# Altium PCB RP2040_minimal.PcbDoc
Units mm, origin at the board's own origin, x right, y up, seen from the top; angles counter-clockwise.
Board outline 50 x 50 mm, 2 copper layers (F.Cu, B.Cu); 41 components, 43 nets, 232 pads, 57 vias.
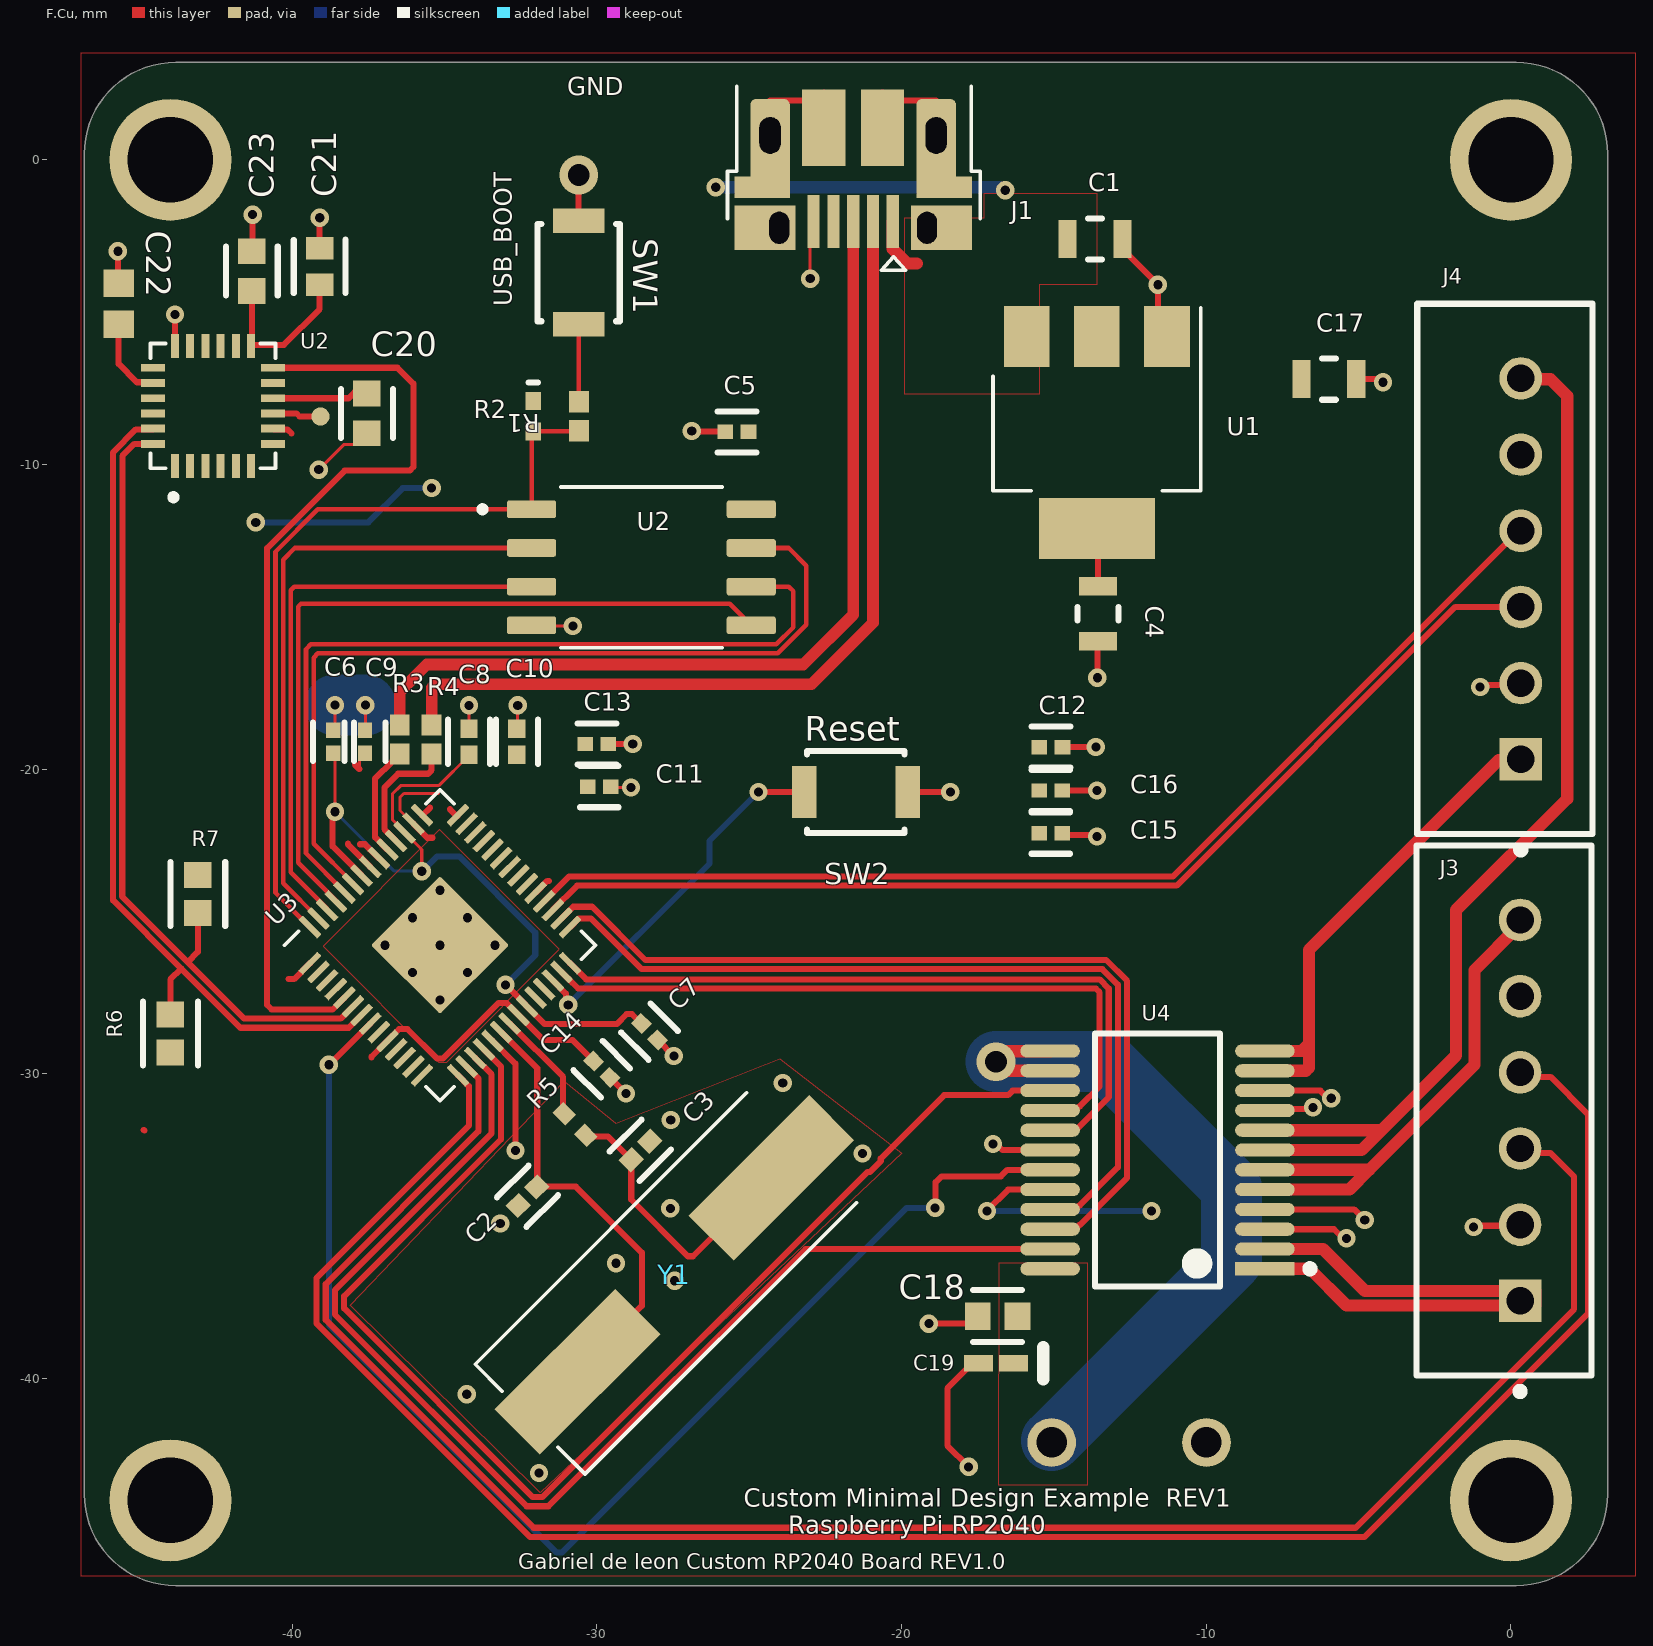
[diagram p0: F.Cu view]
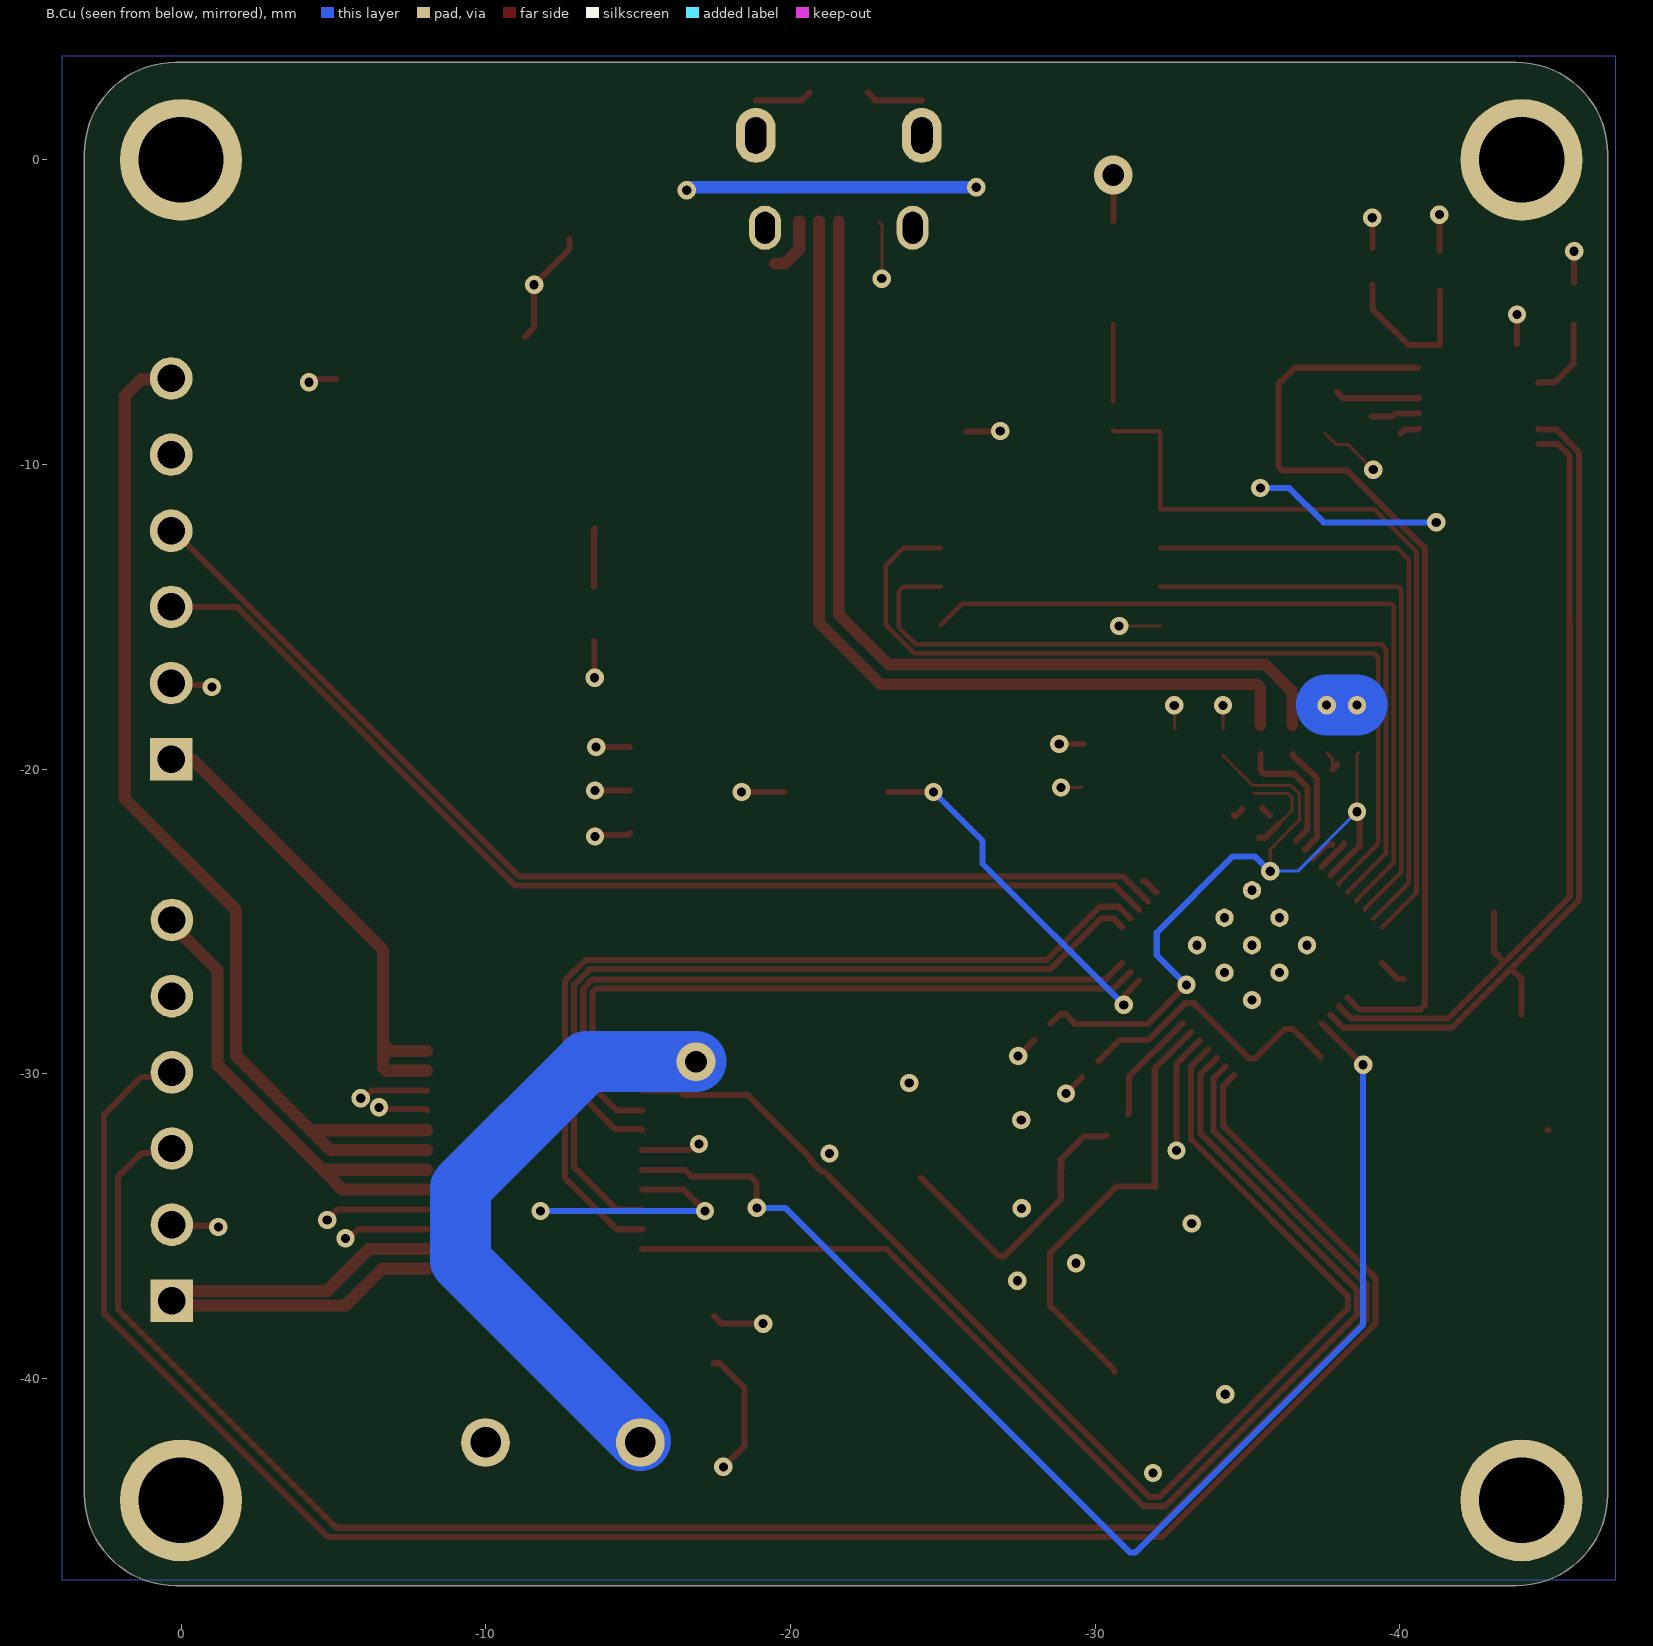
[diagram p1: B.Cu view, seen from below]

## Layer stack, top to bottom
F.Mask: solder mask 0.0102, Solder Resist, Dk 3.5
F.Cu: signal copper 0.0356
Dielectric 1: dielectric 0.32, FR-4, Dk 4.8
B.Cu: signal copper 0.0356
B.Mask: solder mask 0.0102, Solder Resist, Dk 3.5

## Board outline
-46.825,-43.8 -46.825,0.2 cw(c-43.825,0.2) -43.825,3.2 0.175,3.2 cw(c0.175,0.2) 3.175,0.2 3.175,-43.8 cw(c0.175,-43.8) 0.175,-46.8 -43.825,-46.8 cw(c-43.825,-43.8)

## Design rules (kind name [scope] priority, off if disabled: settings)
AssemblyTestPointUsage [All] p0: scope1count=1 scope1_0_kind=Board scope1_0_value=Board scope2count=1 scope2_0_kind=Board scope2_0_value=Board commentlength=0
AssemblyTestpoint [All] p0: scope1count=1 scope1_0_kind=Board scope1_0_value=Board scope2count=1 scope2_0_kind=Board scope2_0_value=Board commentlength=0
BoardOutlineClearance [All] p0: scope1count=1 scope1_0_kind=Board scope1_0_value=Board scope2count=1 scope2_0_kind=Board scope2_0_value=Board commentlength=0 gap=0.2
BoardOutlineClearance [All] p1: gap=0.2 ignorepadtopadclearanceinfootprint=FALSE
Clearance [All] p0: scope1count=1 scope1_0_kind=Board scope1_0_value=Board scope2count=1 scope2_0_kind=Board scope2_0_value=Board commentlength=0 gap=0.2
Clearance [All] p1: gap=0.2 ignorepadtopadclearanceinfootprint=TRUE except(0: Arc-Text Arc-Hole Track-Text Track-Hole SMDPad-Text SMDPad-Hole THPad-Text THPad-Hole Via-Text Via-Hole Fill-Text Fill-Hole Poly-Text Poly-Hole Region-Text Region-Hole Text-Text Text-Hole; 0.1: Arc-Arc Arc-Track Track-Track)
ComponentClearance [All] p0: scope1count=1 scope1_0_kind=Board scope1_0_value=Board scope2count=1 scope2_0_kind=Board scope2_0_value=Board commentlength=0 gap=0.254 collisioncheckmode=3
DiffPairsRouting [All] p0: scope1count=1 scope1_0_kind=Board scope1_0_value=Board scope2count=1 scope2_0_kind=Board scope2_0_value=Board commentlength=0
DiffPairsRouting [All] p1: maxlimit=0.254 minlimit=0.254 mostfreqgap=0.254 toplayer_minwidth=0.381 toplayer_maxwidth=0.381 toplayer_prefwidth=0.381 bottomlayer_minwidth=0.381 bottomlayer_maxwidth=0.381 bottomlayer_prefwidth=0.381 maxuncoupledlength=12.7
FabricationTestPointUsage [All] p0: scope1count=1 scope1_0_kind=Board scope1_0_value=Board scope2count=1 scope2_0_kind=Board scope2_0_value=Board commentlength=0 valid=0 allowmultiple=FALSE
FabricationTestpoint [All] p0: scope1count=1 scope1_0_kind=Board scope1_0_value=Board scope2count=1 scope2_0_kind=Board scope2_0_value=Board commentlength=0 side=3 testpointundercomponent=TRUE minsize=1.016 maxsize=2.54 preferedsize=1.524 minholesize=0 maxholesize=1.016 preferedholesize=0.813 testpointgrid=0.025
FanoutControl Fanout_Default [All] p0: scope1count=1 scope1_0_kind=Board scope1_0_value=Board scope2count=1 scope2_0_kind=Board scope2_0_value=Board commentlength=30 // Fanout_Default (Default Rule)
FanoutControl Fanout_Small [All] p0 off: scope1count=1 scope1_0_kind=Board scope1_0_value=Board scope2count=1 scope2_0_kind=Board scope2_0_value=Board commentlength=84 // Protel DXP Scope 1 Expression Was: (CompPinCount < 5)   Fanout_Small (Default Rule)
FanoutControl Fanout_SOIC [All] p0 off: scope1count=1 scope1_0_kind=Board scope1_0_value=Board scope2count=1 scope2_0_kind=Board scope2_0_value=Board commentlength=71 // Protel DXP Scope 1 Expression Was: IsSOIC   Fanout_SOIC (Default Rule)
FanoutControl Fanout_LCC [All] p0 off: scope1count=1 scope1_0_kind=Board scope1_0_value=Board scope2count=1 scope2_0_kind=Board scope2_0_value=Board commentlength=69 // Protel DXP Scope 1 Expression Was: IsLCC   Fanout_LCC (Default Rule)
FanoutControl Fanout_BGA [All] p0 off: scope1count=1 scope1_0_kind=Board scope1_0_value=Board scope2count=1 scope2_0_kind=Board scope2_0_value=Board commentlength=69 // Protel DXP Scope 1 Expression Was: IsBGA   Fanout_BGA (Default Rule)
Height [All] p0: scope1count=1 scope1_0_kind=Board scope1_0_value=Board scope2count=1 scope2_0_kind=Board scope2_0_value=Board commentlength=0
HoleSize [All] p0: scope1count=1 scope1_0_kind=Board scope1_0_value=Board scope2count=1 scope2_0_kind=Board scope2_0_value=Board commentlength=0 absolutevalues=TRUE maxlimit=6.3 minlimit=0.3 maxpercent=80.000 minpercent=20.000
HoleSize [All] p1: absolutevalues=TRUE maxlimit=6.3 minlimit=0.3 maxpercent=80.000 minpercent=20.000
HoleToHoleClearance [All] p0: scope1count=1 scope1_0_kind=Board scope1_0_value=Board scope2count=1 scope2_0_kind=Board scope2_0_value=Board commentlength=0
LayerPairs [All] p0: scope1count=1 scope1_0_kind=Board scope1_0_value=Board scope2count=1 scope2_0_kind=Board scope2_0_value=Board commentlength=0 enforce=TRUE
MinimumAnnularRing [All] p0: scope1count=1 scope1_0_kind=Board scope1_0_value=Board scope2count=1 scope2_0_kind=Board scope2_0_value=Board commentlength=0 minimumring=0.13
MinimumAnnularRing [All] p1: minimumring=0.13
MinimumSolderMaskSliver [All] p0: scope1count=1 scope1_0_kind=Board scope1_0_value=Board scope2count=1 scope2_0_kind=Board scope2_0_value=Board commentlength=0
MinimumSolderMaskSliver [All] p1: minsoldermaskwidth=0.098
NetAntennae [All] p0: scope1count=1 scope1_0_kind=Board scope1_0_value=Board scope2count=1 scope2_0_kind=Board scope2_0_value=Board commentlength=0
PasteMaskExpansion [All] p0: scope1count=1 scope1_0_kind=Board scope1_0_value=Board scope2count=1 scope2_0_kind=Board scope2_0_value=Board commentlength=0 expansion=0
PlaneClearance [All] p0: scope1count=1 scope1_0_kind=Board scope1_0_value=Board scope2count=1 scope2_0_kind=Board scope2_0_value=Board commentlength=0 clearance=0.508
PlaneConnect [All] p0: scope1count=1 scope1_0_kind=Board scope1_0_value=Board scope2count=1 scope2_0_kind=Board scope2_0_value=Board commentlength=0 planeconnectstyle=Relief reliefexpansion=0.508 reliefentries=4 reliefconductorwidth=0.254 reliefairgap=0.254
PolygonConnect [All] p0: scope1count=1 scope1_0_kind=Board scope1_0_value=Board scope2count=1 scope2_0_kind=Board scope2_0_value=Board commentlength=0 connectstyle=Relief reliefconductorwidth=0.3 reliefentries=4 polygonreliefangle="90 Angle"
PolygonConnect "PTH-M3 Connect" [All] p0: scope1count=1 scope1_0_kind=Board scope1_0_value=Board scope2count=1 scope2_0_kind=Footprint scope2_0_value=PTH-M3 commentlength=0 connectstyle=Direct reliefconductorwidth=0.254 reliefentries=4 polygonreliefangle="90 Angle"
PolygonConnect "PTH-M3 Connect" [All vs HasFootprint('PTH-M3')] p1: connectstyle=Direct reliefconductorwidth=0.254 reliefentries=4 polygonreliefangle="90 Angle" airgapwidth=0.254
PolygonConnect [All] p2: thpad.connectstyle=Relief thpad.reliefconductorwidth=0.3 thpad.reliefentries=4 thpad.polygonreliefangle="90 Angle" thpad.airgapwidth=0.1 smdpad.connectstyle=Relief smdpad.reliefconductorwidth=0.3 smdpad.reliefentries=4 smdpad.polygonreliefangle="90 Angle" smdpad.airgapwidth=0.1 via.connectstyle=Direct via.reliefconductorwidth=0.254 via.reliefentries=4 via.polygonreliefangle="90 Angle" via.airgapwidth=0.254
RoutingCorners [All] p0: scope1count=1 scope1_0_kind=Board scope1_0_value=Board scope2count=1 scope2_0_kind=Board scope2_0_value=Board commentlength=0 cornerstyle=45-Degree minsetback=2.54 maxsetback=2.54
RoutingLayers [All] p0: scope1count=1 scope1_0_kind=Board scope1_0_value=Board scope2count=1 scope2_0_kind=Board scope2_0_value=Board commentlength=0 top layer=Automatic bottom layer=Automatic
RoutingPriority [All] p0: scope1count=1 scope1_0_kind=Board scope1_0_value=Board scope2count=1 scope2_0_kind=Board scope2_0_value=Board commentlength=0
RoutingTopology [All] p0: scope1count=1 scope1_0_kind=Board scope1_0_value=Board scope2count=1 scope2_0_kind=Board scope2_0_value=Board commentlength=0 topology=Shortest
RoutingVias [All] p0: scope1count=1 scope1_0_kind=Board scope1_0_value=Board scope2count=1 scope2_0_kind=Board scope2_0_value=Board commentlength=0 holewidth=0.3 width=0.6 viastyle="Through Hole" minholewidth=0.3 minwidth=0.45 maxholewidth=6.35 maxwidth=3
RoutingVias [All] p1: holewidth=0.3 width=0.6 viastyle="Through Hole" minholewidth=0.3 minwidth=0.45 maxholewidth=6.35 maxwidth=3
ShortCircuit [All] p0: scope1count=1 scope1_0_kind=Board scope1_0_value=Board scope2count=1 scope2_0_kind=Board scope2_0_value=Board commentlength=0 allowed=FALSE
SilkToBoardRegionClearance [All] p0: scope1count=1 scope1_0_kind=Board scope1_0_value=Board scope2count=1 scope2_0_kind=Board scope2_0_value=Board commentlength=0
SilkToSilkClearance [All] p0: scope1count=1 scope1_0_kind=Board scope1_0_value=Board scope2count=1 scope2_0_kind=Board scope2_0_value=Board commentlength=0
SilkToSilkClearance [All] p1: silktosilkclearance=0.1
SilkToSolderMaskClearance [All] p0 off: scope1count=1 scope1_0_kind=Board scope1_0_value=Board scope2count=1 scope2_0_kind=Board scope2_0_value=Board commentlength=44 // Protel DXP Scope 1 Expression Was: IsPad
SilkToSolderMaskClearance [IsPad] p1: minsilkscreentomaskgap=0 clearancetoexposedcopper=TRUE
SolderMaskExpansion [All] p0: scope1count=1 scope1_0_kind=Board scope1_0_value=Board scope2count=1 scope2_0_kind=Board scope2_0_value=Board commentlength=0 expansion=0.038
SolderMaskExpansion "Tent Vias" [All] p0 off: scope1count=1 scope1_0_kind=Board scope1_0_value=Board scope2count=1 scope2_0_kind=Board scope2_0_value=Board commentlength=44 expansion=0.102 // Protel DXP Scope 1 Expression Was: IsVia
SolderMaskExpansion "Tent Vias" [IsVia] p1: expansion=0.102 istentingtop=TRUE
SolderMaskExpansion [All] p2: expansion=0.038 istentingtop=FALSE
UnRoutedNet [All] p0: scope1count=1 scope1_0_kind=Board scope1_0_value=Board scope2count=1 scope2_0_kind=Board scope2_0_value=Board commentlength=0
UnpouredPolygon [All] p0: scope1count=1 scope1_0_kind=Board scope1_0_value=Board scope2count=1 scope2_0_kind=Board scope2_0_value=Board commentlength=0
Width [All] p0: scope1count=1 scope1_0_kind=Board scope1_0_value=Board scope2count=1 scope2_0_kind=Board scope2_0_value=Board commentlength=0 maxlimit=2 minlimit=0.1 preferedwidth=0.2
Width PowerNets [All] p0: scope1count=1 scope1_0_kind=NetClass scope1_0_value=PowerNets scope2count=1 scope2_0_kind=Board scope2_0_value=Board commentlength=0 maxlimit=0.5 minlimit=0.2 preferedwidth=0.2
Width PowerNets [InNetClass('PowerNets')] p1: maxlimit=0.5 minlimit=0.2 preferedwidth=0.2 minimp=50.000000 maximp=50.000000 favimp=50.000000
Width [All] p2: maxlimit=2 minlimit=0.1 preferedwidth=0.2 minimp=50.000000 maximp=50.000000 favimp=50.000000
25 further rules are at their usual default settings.

## Classes and differential pairs
differential pair " ": +USB_D_P -USB_D_N

## Components (designator, comment, footprint, x,y, rotation, side; value= is the part's Value field where it differs from the comment)
C1 "GRM21BR61C106KE15K" FP-GRM21B-0_1-MFG -13.652,-2.6 r0 top
C2 "GCM1555C1H270JA16D" FP-GCM155-0_05-IPC_B -32.278,-34.019 r225 top
C3 "GCM1555C1H270JA16D" FP-GCM155-0_05-IPC_B -28.572,-32.513 r45 top
C4 "GRM21BR61C106KE15K" FP-GRM21B-0_1-MFG -13.55,-14.9 r270 top
C5 "GRM155R71E104KE14J" FP-GRM155-0_05-IPC_C -25.405,-8.93 r180 top
C6 "GRM155R71E104KE14J" FP-GRM155-0_05-IPC_C -38.65,-19.1 r90 top
C7 "GRM155R71E104KE14J" FP-GRM155-0_05-IPC_C -28.275,-28.616 r315 top
C8 "GCM1555C1H270JA16D" FP-GCM155-0_05-IPC_B -34.2,-19.1 r90 top
C9 "GRM155R71E104KE14J" FP-GRM155-0_05-IPC_C -37.611,-19.1 r90 top
C10 "GCM1555C1H270JA16D" FP-GCM155-0_05-IPC_B -32.625,-19.1 r90 top
C11 "GRM155R71E104KE14J" FP-GRM155-0_05-IPC_C -29.925,-20.575 r0 top
C12 "GRM155R71E104KE14J" FP-GRM155-0_05-IPC_C -15.1,-19.275 r0 top
C13 "GRM155R71E104KE14J" FP-GRM155-0_05-IPC_C -30.004,-19.175 r0 top
C14 "GRM155R71E104KE14J" FP-GRM155-0_05-IPC_C -29.843,-29.848 r315 top
C15 "GRM155R71E104KE14J" FP-GRM155-0_05-IPC_C -15.105,-22.1 r0 top
C16 "GRM155R71E104KE14J" FP-GRM155-0_05-IPC_C -15.105,-20.7 r0 top
C17 "GRM21BR61C106KE15K" FP-GRM21B-0_1-MFG -5.975,-7.2 r0 top
C18 "C0603X104K5RACTU" FP-C0603-CJ-MFG -16.85,-37.95 r0 top
C19 "TR8M106M010C2000" VISH-TR8-M_L -16.9,-39.5 r180 top
C20 "C0603X104K5RACTU" FP-C0603-CJ-MFG -37.55,-8.325 r270 top
C21 "C0603C103J3GACTU" FP-C0603C-CF-MFG -39.1,-3.5 r90 top
C22 "C0603X222K5RACTU" CAPC1608X87X35NL15T15 -45.7,-4.725 r90 top
C23 "C0603X104K5RACTU" FP-C0603-CJ-MFG -41.325,-3.65 r90 top
J1 "USB_B_Micro" USB_Micro-B_Amphenol_10103594-0001LF_Horizontal_modified -21.59,0.8 r180 top
J3 "B6B-XH-A(LF)(SN)" FP-B6B-XH-A_LF_SN-MFG -0.225,-31.2 r90 top
J4 "B6B-XH-A(LF)(SN)" FP-B6B-XH-A_LF_SN-MFG -0.2,-13.425 r90 top
R1 "RC0402FR-0727R4L" RESC1005X40X25ML05T10 -30.59,-8.415 r270 top
R2 "DNF" 0402-A -32.09,-8.415 r270 top
R3 "RC0402FR-0727R4L" RESC1005X40X25ML05T10 -36.475,-19.025 r90 top
R4 "RC0402FR-0727R4L" RESC1005X40X25ML05T10 -35.425,-19.025 r90 top
R5 "ERJ-8ENF1001V" 0402 -30.721,-31.669 r135 top
R6 "ERA-3AEB103V" FP-ERA3A-IPC_C -44,-28.674 r90 top
R7 "ERA-3AEB103V" FP-ERA3A-IPC_C -43.1,-24.1 r270 top
SW1 "B3U-1000P" FP-B3U-1000P-MFG -30.6,-3.7 r270 top
SW2 "B3U-1000P" FP-B3U-1000P-MFG -21.5,-20.75 r180 top
U1 "NCP1117-3.3_SOT223" SOT-223-3_TabPin2 -13.59,-8.95 r270 top
U2 "MPU-6050" QFN50P400X400X95-24N -42.6,-8.075 r90 top
U2 "W25Q128JVS" SOIC127P790X216-8N -28.54,-13.375 r0 top
U3 "RP2040" Pico2040-QFN-56 -35.151,-25.778 r45 top
U4 "TB6612FNG,C,8,EL" FP-SSOP24-P-300-0_65A-IPC_A -11.6,-32.825 r180 top
Y1 "ABLS-12.000MHZ-B4-T" Crystal_SMD_HC49-US -27.457,-36.598 r45 top

## Footprints (in the part's own frame and the unit in brackets; to place one, negate y for a bottom-side part, rotate by r counter-clockwise, add the part's x,y. Pads: shape width x height; smd on the part's side, far side on the other; paste and mask are expansions set on the pad)
0402 [mm] "Chip Capacitor, Body 1.0x0.5mm, IPC High Density"
  rect 0.6x0.5 smd: 1(-0.5,0) 2(0.5,0)
0402-A [mm] "Chip Inductor, Body 1.0x0.5mm, IPC High Density"
  rect 0.6x0.5 smd: 1(-0.5,0) 2(0.5,0)
  silkscreen extent -1.1,-0.15 -1.1,0.15
CAPC1608X87X35NL15T15 [mm] "Chip Capacitor, 2-Leads, Body 1.60x0.80mm, IPC Medium Density"
  rect 0.9x1 smd: 1(-0.675,0) 2(0.675,0)
Crystal_SMD_HC49-US [mm]
  rect 5.6x2.1 smd: 1(-4.5,0) 2(4.5,0)
  silkscreen extent -6.7,-2.55 5.9,2.55
FP-B3U-1000P-MFG [mm]
  rect 0.8x1.7 smd paste+0 mask+0: 1(-1.7,0) 2(1.7,0)
  silkscreen extent -1.6,-1.35 1.6,1.35
FP-B6B-XH-A_LF_SN-MFG [mm]
  rect 1.4x1.4 hole 0.9 paste-1000 mask+0: 1(-6.25,-0.525)
  round 1.4 hole 0.9 paste-1000 mask+0: 2(-3.75,-0.525) 3(-1.25,-0.525) 4(1.25,-0.525) 5(3.75,-0.525) 6(6.25,-0.525)
  silkscreen extent -9.35,-2.88 8.7,2.88
FP-C0603-CJ-MFG [mm]
  rect 0.85x0.9 smd paste+0 mask+0: 1(-0.65,0) 2(0.65,0)
  silkscreen extent -0.8,-0.85 0.8,0.85
FP-C0603C-CF-MFG [mm]
  rect 0.75x0.9 smd paste+0 mask+0: 1(-0.6,0) 2(0.6,0)
  silkscreen extent -0.87,-0.85 0.88,0.85
FP-ERA3A-IPC_C [mm]
  rect 0.855x0.906 smd paste+0 mask+0: 1(-0.626,0) 2(0.626,0)
  silkscreen extent -1.05,-0.9 1.05,0.9
FP-GCM155-0_05-IPC_B [mm]
  rect 0.615x0.572 smd paste+0 mask+0: 1(-0.429,0) 2(0.429,0)
  silkscreen extent -0.74,-0.69 0.74,0.69
FP-GRM21B-0_1-MFG [mm]
  rect 0.6x1.25 smd paste+0 mask+0: 1(-0.9,0) 2(0.9,0)
  silkscreen extent -0.23,-0.67 0.23,0.67
FP-GRM155-0_05-IPC_C [mm]
  rect 0.515x0.472 smd paste+0 mask+0: 1(-0.379,0) 2(0.379,0)
  silkscreen extent -0.64,-0.67 0.64,0.67
FP-SSOP24-P-300-0_65A-IPC_A [mm]
  rect 1.954x0.432 smd paste+0 mask+0: 1(-3.525,3.575)
  rrect100% 1.954x0.432 smd paste+0 mask+0: 2(-3.525,2.925) 3(-3.525,2.275) 4(-3.525,1.625) 5(-3.525,0.975) 6(-3.525,0.325) 7(-3.525,-0.325) 8(-3.525,-0.975) 9(-3.525,-1.625) 10(-3.525,-2.275) 11(-3.525,-2.925) 12(-3.525,-3.575) 13(3.525,-3.575) 14(3.525,-2.925) 15(3.525,-2.275) 16(3.525,-1.625) 17(3.525,-0.975) 18(3.525,-0.325) 19(3.525,0.325) 20(3.525,0.975) 21(3.525,1.625) 22(3.525,2.275) 23(3.525,2.925) 24(3.525,3.575)
  silkscreen extent -5.13,-4.15 2.05,4.15
Pico2040-QFN-56 [mm]
  rrect25% 0.875x0.2 smd: 1(-3.437,2.6) 2(-3.437,2.2) 3(-3.437,1.8) 4(-3.437,1.4) 5(-3.437,1) 6(-3.437,0.6) 7(-3.438,0.2) 8(-3.438,-0.2) 9(-3.437,-0.6) 10(-3.437,-1) 11(-3.437,-1.4) 12(-3.437,-1.8) 13(-3.437,-2.2) 14(-3.437,-2.6) 29(3.437,-2.6) 30(3.437,-2.2) 31(3.437,-1.8) 32(3.437,-1.4) 33(3.437,-1) 34(3.437,-0.6) 35(3.438,-0.2) 36(3.438,0.2) 37(3.437,0.6) 38(3.437,1) 39(3.437,1.4) 40(3.437,1.8) 41(3.437,2.2) 42(3.437,2.6)
  rrect25% 0.2x0.875 smd: 15(-2.6,-3.437) 16(-2.2,-3.437) 17(-1.8,-3.437) 18(-1.4,-3.437) 19(-1,-3.437) 20(-0.6,-3.437) 21(-0.2,-3.438) 22(0.2,-3.438) 23(0.6,-3.437) 24(1,-3.437) 25(1.4,-3.437) 26(1.8,-3.437) 27(2.2,-3.437) 28(2.6,-3.437) 43(2.6,3.437) 44(2.2,3.437) 45(1.8,3.437) 46(1.4,3.437) 47(1,3.437) 48(0.6,3.437) 49(0.2,3.438) 50(-0.2,3.438) 51(-0.6,3.437) 52(-1,3.437) 53(-1.4,3.437) 54(-1.8,3.437) 55(-2.2,3.437) 56(-2.6,3.437)
  round 0.6 hole 0.3: 57(-1.275,0) 57(-1.275,-1.275) 57(-1.275,1.275) 57(0,0) 57(0,-1.275) 57(0,1.275) 57(1.275,-1.275) 57(1.275,1.275) 57(1.275,0)
  rrect4% 3.2x3.2 smd: 57(0,0)
  rrect23% 1.084x1.084 on Top Paste: Un1(-0.637,0.637) Un2(-0.637,-0.637) Un3(0.637,0.637) Un4(0.637,-0.637)
  silkscreen extent -3.61,-3.61 3.61,3.61
QFN50P400X400X95-24N [mm]
  rect 0.79x0.26 smd: 1(-1.97,1.25) 2(-1.97,0.75) 3(-1.97,0.25) 4(-1.97,-0.25) 5(-1.97,-0.75) 6(-1.97,-1.25) 13(1.97,-1.25) 14(1.97,-0.75) 15(1.97,-0.25) 16(1.97,0.25) 17(1.97,0.75) 18(1.97,1.25)
  rect 0.26x0.79 smd: 7(-1.25,-1.97) 8(-0.75,-1.97) 9(-0.25,-1.97) 10(0.25,-1.97) 11(0.75,-1.97) 12(1.25,-1.97) 19(1.25,1.97) 20(0.75,1.97) 21(0.25,1.97) 22(-0.25,1.97) 23(-0.75,1.97) 24(-1.25,1.97)
  silkscreen extent -3.1,-2.05 2.05,2.05
RESC1005X40X25ML05T10 [mm] "Chip Resistor, 2-Leads, Body 1.00x0.50mm, IPC Low Density"
  rect 0.7x0.65 smd: 1(-0.475,0) 2(0.475,0)
SOIC127P790X216-8N [mm]
  rrect25% 1.61x0.58 smd: 1(-3.605,1.905) 2(-3.605,0.635) 3(-3.605,-0.635) 4(-3.605,-1.905) 5(3.605,-1.905) 6(3.605,-0.635) 7(3.605,0.635) 8(3.605,1.905)
  silkscreen extent -5.31,-2.64 2.64,2.64
SOT-223-3_TabPin2 [mm]
  rect 2x1.5 smd mask+0: 1(-3.15,2.3) 2(-3.15,0) 3(-3.15,-2.3)
  rect 2x3.8 smd mask+0: 2(3.15,0)
  silkscreen extent -4.1,-3.41 1.91,3.41
USB_Micro-B_Amphenol_10103594-0001LF_Horizontal_modified [mm]
  rect 0.4x1.75 smd: 1(-1.3,2.825) 2(-0.65,2.825) 3(0,2.825) 4(0.65,2.825) 5(1.3,2.825)
  rect 1.825x0.7 smd: 6(-2.987,1.7) 6(2.987,1.7)
  rect 2x1.46 smd: 6(-2.9,3.03) 6(2.9,3.03)
  rrect100% 1.3x1.8 hole 0.7 slot 1.2 at 90 deg: 6(-2.725,0) 6(2.725,0)
  rrect30% 1.3x3.25 smd: 6(-2.725,0.425) 6(2.725,0.425)
  rrect100% 1.05x1.45 hole 0.65 slot 1.05 at 90 deg: 6(-2.425,3.03) 6(2.425,3.03)
  rect 1.425x2.5 smd: 6(-0.962,-0.25) 6(0.962,-0.25)
  silkscreen extent -4.18,-1.62 4.13,4.43
VISH-TR8-M_L [mm] "Molded Capacitor, 2-Leads, Body 1.8x1.05mm, IPC High Density"
  rect 0.95x0.55 smd: 1(-0.575,0) 2(0.575,0)
  silkscreen extent -1.55,-0.53 -1.55,0.53

## Part data
C1 C4 C17: library part CMP-2007-03534-2, "Chip Multilayer Ceramic Capacitors for General Purpose, 0805, 10uF, X5R, 15%, 10%, 16V"
C2 C3 C8 C10: library part CMP-06035-017587-1, "Ceramic Capacitor for Automotive 27pF ±5% 50VDC C0G 0402 Paper T/R"
C5 C6 C7 C9 C11 C12 C13 C14 C15 C16: library part CMP-06035-003995-1, "Chip Multilayer Ceramic Capacitors for General Purpose, 0402, 0.10uF, X7R, 15%, 10%, 25V"
C18 C20 C23: library part CMP-2006-03300-2, "CAP CER 0.1UF 50V X7R 0603"
C19: library part CMP-2000-07316-1, "Tantalum Capacitor, 10 uF, +/- 20%, 10 V, -55 to 125 degC, 2-Pin SMD (M), RoHS, Tape and Reel"
C21: library part CMP-2006-03705-3, "CAP CER 10000PF 25V 5% NP0 0603"
C22: library part CMP-2006-03302-1
J3 J4: library part CMP-17439-000076-1, "CONN HEADER VERT 6POS 2.5MM"
R1 R3 R4: library part CMP-2002-07553-1
R2: library part R
R6 R7: library part CMP-2000-00874-2, "RES SMD 10K OHM 0.1% 1/10W 0603"
SW1 SW2: library part CMP-2100-03586-2, "SWITCH TACTILE SPST-NO 0.05A 12V"
U2: "MPU-6050 series Accelerometer, Gyroscope, 3 Axis Sensor Evaluation Board"
U4: library part CMP-2100-03693-4, "IC MOTOR DRIVER 2.7V-5.5V 24SSOP"
Y1: library part Crystal

## Free pads (board coordinates)
  round 1.6 hole 1 paste-1000 mask+0: 3(-15.074,-42.1) 3(-9.994,-42.1)
  round 4 hole 2.8 paste-1000 mask+0: 5(0,0) 6(0,-44) 7(-44,-44) 8(-44,0)
  round 0.6 smd paste-1000 mask+0: 9(-39.075,-8.425)

## Via types
v1: diameter 0.6, hole 0.3, F.Cu to B.Cu, tented both sides, 55 vias
v2: diameter 1.27, hole 0.711, F.Cu to B.Cu, tented both sides, 2 vias

## Nets (pads, with @x,y where several pads share a name; then routed paths per layer and width w, separated by ;. In a path a pad name is that pad's centre, name@x,y a point inside that pad or via, vN(x,y) a via of type N, cw(c..) or ccw(c..) an arc to the next point about the centre after c; other vN are vias at no path point)
+1V1: C6.1 C7.1 C8.1 U3.23 U3.45 U3.50 | length 26.4
  F.Cu w0.1: C6.1 -38.6,-19.529 v1(-38.6,-21.4) ; v1(-35.75,-23.35) -35.75,-22.634 U3.45 -36.309,-22.059 -36.717,-21.651 -36.717,-20.817 -36.444,-20.544 -35.194,-20.544 -34.2,-19.55 C8.1
  F.Cu w0.2: v1(-38.6,-21.4) -38.675,-21.475 -38.675,-22.537 U3.50 ; v1(-33,-27.08) -31.715,-28.366 -29.349,-28.366 -29.02,-28.037 -28.854,-28.037 C7.1
  B.Cu w0.1: v1(-38.6,-21.4) -36.65,-23.35 v1(-35.75,-23.35)
  B.Cu w0.2: v1(-35.75,-23.35) -35.729,-23.35 -35.244,-22.866 -34.525,-22.866 -32.025,-25.366 -32.025,-26.105 v1(-33,-27.08)
+3V3: C4.1 C5.1 C9.1 C10.1 C11.1 C12.1 C13.1 C14.1 C15.1 C16.1 C17.1 C21.1 C23.1 J3.5 J4.5 R2.1 R6.1 R7.1 U1.2 U2.8 U2.13 U3.1 U3.10 U3.22 U3.33 U3.42 U3.43 U3.44 U3.48 U3.49 U4.20 | length 49.3
  F.Cu w0.1: -37.8,-20 -37.797,-19.997 -37.797,-19.665 C9.1 ; U3.44 -36.462,-21.356 -36.462,-20.922 -36.338,-20.799 -35.194,-20.799
  F.Cu w0.2: -44.875,-31.841 -44.85,-31.866 ; C23.1 -41.325,-6.075 -40.275,-6.075 -39.1,-4.9 C21.1 ; U2.8@-40.63,-8.825 -40.6,-8.855 -40.151,-8.855 -40.023,-8.983 ; -40.125,-26.891 -39.941,-26.891 U3.1 ; -38.175,-22.441 -38.175,-22.471 U3.49 ; -37.947,-19.836 -37.947,-19.853 -37.8,-20 ; -37.775,-22.466 -37.615,-22.466 U3.48 ; -37.4,-29.466 -37.4,-29.441 U3.10 -36.488,-28.529 -36.219,-28.529 -35.253,-29.494 -35.05,-29.494 -33.918,-28.363 -33.235,-27.68 -32.966,-27.68 U3.22 -31.759,-28.887 -30.803,-28.887 C14.1 ; U3.44 -35.568,-22.25 -35.4,-22.25 ; U3.43 -35.731,-21.522 -35.475,-21.266 ; -34.825,-21.316 -34.596,-21.545 U3.42 ; U3.33 -31.627,-23.667 -31.573,-23.667 ; v1(-17.2,-34.5) -16.5,-33.8 U4.20 ; U1.2@-13.59,-12.1 -13.55,-12.14 C4.1
  B.Cu w0.2: v1(-41.2,-11.9) -37.5,-11.9 -36.375,-10.775 v1(-35.425,-10.775) ; v1(-17.2,-34.5) v1(-11.8,-34.5)
  B.Cu w0.4: v1(-26.1,-0.9) -16.754,-0.9 -16.654,-1 v1(-16.6,-1)
A01: J3.1 U4.1 U4.2 | length 19.3
  F.Cu w0.2: -6.25,-35.75 -6.165,-35.75
  F.Cu w0.4: U4.1 -6.6,-36.4 -5.4,-37.6 0.8,-37.6 0.8,-37.126 -4.79,-37.126 -6.165,-35.75 ; U4.2 -6.25,-35.75
A02: J3.6 U4.5 U4.6 | length 17.2
  F.Cu w0.4: U4.5 -5.3,-33.8 -4.65,-33.15 ; U4.6 -4.65,-33.15 ; J3.6@0.281,-25.119 -1.2,-26.6 -1.2,-29.7 -4.65,-33.15
AD0: pad.9 U2.9 | length 1.6
  F.Cu w0.2: U2.9 -39.862,-8.325 -39.762,-8.425 pad.9
AIN1: U3.29 U4.21 | length 27.8
  F.Cu w0.2: U3.29 -30.597,-24.9 -30.2,-24.9 -28.536,-26.564 -13.412,-26.564 -12.9,-27.076 -12.9,-33.065 -14.151,-34.316 -14.168,-34.316 -14.302,-34.45 U4.21
AIN2: U3.30 U4.22 | length 29.4
  F.Cu w0.2: U3.30 -30.778,-24.516 -30.16,-24.516 -28.411,-26.264 -13.288,-26.264 -12.6,-26.952 -12.6,-33.415 -14.151,-34.966 -14.168,-34.966 -14.302,-35.1 U4.22
BIN1: U3.28 U4.17 | length 24
  F.Cu w0.2: U3.28 -30.352,-26.9 -13.501,-26.9 -13.2,-27.201 -13.2,-30.765 -14.24,-31.806 -15.081,-31.806 U4.17
BIN2: U3.27 U4.16 | length 23
  F.Cu w0.2: U3.27 -30.926,-26.892 -30.618,-27.2 -13.625,-27.2 -13.5,-27.325 -13.5,-30.415 -14.151,-31.066 -14.168,-31.066 -14.302,-31.2 U4.16
BO1: J4.1 U4.11 U4.12 | length 15.7
  F.Cu w0.4: U4.11 -6.734,-29.9 -6.633,-29.799 -6.633,-29.016 ; U4.12 -6.867,-29.25 -6.633,-29.016 ; -0.4,-19.7 -6.633,-25.933 -6.633,-29.016
BO2: J4.6 U4.7 U4.8 | length 36.3
  F.Cu w0.4: U4.7 -4.9,-32.5 -4.25,-31.85 ; U4.8 -4.25,-31.85 ; J4.6 0.35,-7.2 1.3,-7.2 1.85,-7.75 1.85,-20.975 -1.8,-24.625 -1.8,-29.4 -4.25,-31.85
GND: C1.2 C2.2 C3.2 C4.2 C5.2 C6.2 C7.2 C8.2 C9.2 C10.2 C11.2 C12.2 C13.2 C14.2 C15.2 C16.2 C17.2 C18.1 C19.2 C20.2 C21.2 C22.2 C23.2 J1.5 J1.6 J3.2 J4.2 pad.3@-9.994,-42.1 SW1.1 SW2.1 U1.1 U2.4@-32.145,-15.28 U2.18 U3.19 U3.57 U4.3 U4.4 U4.9 U4.10 U4.18 | length 58.8
  F.Cu w0.1: C22.2@-45.725,-4.025 C22.2 ; U2.18@-43.85,-6.05 U2.18@-43.825,-6.075 ; C23.2 C23.2@-41.3,-2.975 ; v1(-39.131,-10.17) -38.31,-9.35 -37.925,-9.35 C20.2 ; C6.2 -38.6,-18.671 v1(-38.6,-17.9) ; C9.2 -37.6,-18.71 v1(-37.6,-17.9) ; C8.2 v1(-34.2,-17.905) ; C10.2 -32.6,-18.646 v1(-32.6,-17.905) ; U2.4@-32.145,-15.28 -32.125,-15.3 v1(-30.79,-15.3) ; C11.2 -29.521,-20.6 v1(-28.879,-20.6) ; v1(-23,-3.9) -23,-2.135 J1.5 ; v1@-4.3,-7.2 v1(-4.2,-7.3)
  F.Cu w0.2: C22.2@-45.725,-4.025 v1(-45.725,-3) ; U2.18@-43.85,-6.05 v1(-43.85,-5.075) ; C23.2@-41.3,-2.975 v1(-41.3,-1.8) ; C21.2 v1(-39.1,-1.9) ; U3.19 -32.675,-29.669 v1(-32.675,-32.516) ; SW1.1 v2(-30.6,-0.5) ; C13.2 v1(-28.825,-19.175) ; C14.2 v1(-29.043,-30.648) ; C7.2 v1(-27.475,-29.416) ; v1(-26.89,-8.9) -26.875,-8.915 -25.799,-8.915 C5.2 ; J1.6@-24.315,1.95 -22.802,1.95 J1.6@-22.552,2.2 ; J1.6@-20.628,2.2 -20.378,1.95 J1.6@-18.865,1.95 ; SW2.1 v1(-18.4,-20.75) ; v1(-19.106,-38.2) -17.75,-38.2 C18.1 ; v1(-17.8,-42.9) -18.5,-42.2 -18.5,-40.325 -17.675,-39.5 C19.2 ; v1(-17,-32.3) -16.892,-32.3 -16.692,-32.5 U4.18 ; C15.2 -14.672,-22.155 -13.645,-22.155 v1(-13.59,-22.21) ; C16.2 v1(-13.59,-20.7) ; C12.2 v1(-13.625,-19.275) ; v1(-13.575,-17) -13.575,-15.825 C4.2 ; C1.2 -12.752,-2.925 -11.59,-4.088 v1(-11.59,-4.1) -11.59,-5.5 U1.1 ; U4.3 -5.808,-35.1 -5.508,-35.4 v1(-5.4,-35.4) ; U4.4 -5.15,-34.45 v1(-4.8,-34.8) ; U4.9 -8.03,-31.156 -6.556,-31.156 v1(-6.5,-31.1) ; U4.10 -6.258,-30.55 -6.008,-30.8 v1(-5.9,-30.8) ; C17.2 v1@-4.3,-7.2 ; v1(-1.225,-35.025) -1.187,-34.987 0.263,-34.987 J3.2 ; v1(-1.01,-17.3) -0.947,-17.238 0.262,-17.238 J4.2
  B.Cu w2: v1(-38.6,-17.9) v1(-37.6,-17.9)
  other v1: -31.9,-43.1 -34.275,-40.516 -27.449,-36.79 -29.375,-36.216 -33.175,-34.916 -27.589,-34.416 -21.284,-32.616 -27.575,-31.516 -23.9,-30.3
INT: U2.12 U3.5 | length 31.2
  F.Cu w0.2: U2.12@-40.6,-6.825 -36.55,-6.825 -36.025,-7.35 -36.025,-10.083 -36.142,-10.2 -38.276,-10.2 -40.825,-12.749 -40.825,-27.741 -40.678,-27.888 -38.676,-27.888 U3.5
MA1: J3.4 U3.15 | length 67.4
  F.Cu w0.2: U3.15 -34.2,-30.406 -34.2,-31.7 -39.2,-36.7 -39.2,-38.2 -32.2,-45.2 -4.8,-45.2 2.525,-37.875 2.525,-31.325 1.3,-30.1 0.45,-30.1 J3.4
MA2: J4.4 U3.32 | length 37.1
  F.Cu w0.2: U3.32 -30.919,-23.525 -11.099,-23.525 0.251,-12.175 J4.4
MB1: J3.3 U3.16 | length 63.8
  F.Cu w0.2: U3.16 -33.89,-30.151 -33.89,-31.89 -38.9,-36.9 -38.9,-38.076 -32.076,-44.9 -5.1,-44.9 2.075,-37.725 2.075,-33.375 1.3,-32.6 0.45,-32.6 J3.3
MB2: J4.3 U3.31 | length 36.1
  F.Cu w0.2: U3.31 -30.653,-23.825 -10.975,-23.825 -1.825,-14.675 0.15,-14.675 J4.3 ; J4.3@0.15,-14.7 J4.3@0.325,-14.7
NetC3_1: C3.1 R5.1 Y1.2 | length 9.6
  F.Cu w0.2: R5.1 -30.333,-32.058 -29.633,-32.058 C3.1 -28.89,-32.831 -28.89,-33.094 -28.875,-33.109 -28.875,-34.125 -27.013,-35.987 -26.847,-35.987 Y1.2
NetC20_1: C20.1 U2.10 | length 2.8
  F.Cu w0.2: U2.10 -38.15,-7.825 C20.1@-37.95,-7.625
NetC22_1: C22.1 U2.20 | length 2.7
  F.Cu w0.2: C22.1 -45.7,-6.699 -45.099,-7.3 -44.575,-7.3 U2.20@-44.55,-7.325
NetR3_1: R3.1 U3.47 | length 3.7
  F.Cu w0.2: U3.47 -37.279,-22.236 -37.279,-20.304 -36.725,-19.75 -36.7,-19.75 -36.475,-19.525 R3.1
NetR4_1: R4.1 U3.46 | length 4.2
  F.Cu w0.2: U3.46 -36.979,-21.97 -36.979,-20.604 -36.525,-20.15 -35.542,-20.15 -35.425,-20.033 R4.1
PWMA: U3.17 U4.23 | length 40.4
  F.Cu w0.2: U3.17 -33.455,-30.02 -33.455,-31.955 -38.6,-37.1 -38.6,-37.9 -32.306,-44.194 -31.594,-44.194 -23.15,-35.75 U4.23
PWMB: U3.18 U4.15 | length 42.2
  F.Cu w0.2: U3.18 -33.155,-29.754 -33.155,-32.155 -38.3,-37.3 -38.3,-37.7 -32.106,-43.894 -31.794,-43.894 -21.116,-33.216 -21.035,-33.216 -20.684,-32.865 -20.684,-32.784 -18.6,-30.7 -16.503,-30.7 -16.353,-30.55 U4.15
QSPI_SCLK: U2.6@-24.935,-14.01 U3.52 | length 27.4
  F.Cu w0.15: U3.52 -38.289,-24.019 -39.55,-22.758 -39.55,-16.063 -39.387,-15.9 -24.114,-15.9 -23.55,-15.336 -23.55,-14.163 -23.703,-14.01 U2.6@-24.935,-14.01
QSPI_SD0: U2.5@-24.935,-15.28 U3.53 | length 25.4
  F.Cu w0.15: U3.53 -38.572,-24.302 -39.8,-23.074 -39.8,-14.663 -39.712,-14.575 -25.64,-14.575 U2.5@-24.935,-15.28
QSPI_SD1: U2.2@-32.145,-12.74 U3.55 | length 20.6
  F.Cu w0.15: U3.55 -40.3,-23.741 -40.3,-13.125 -39.915,-12.74 U2.2@-32.145,-12.74
QSPI_SD2: U2.3@-32.145,-14.01 U3.54 | length 18.9
  F.Cu w0.15: U3.54 -38.855,-24.585 -40.05,-23.39 -40.05,-14.123 -39.937,-14.01 U2.3@-32.145,-14.01
QSPI_SD3: U2.7@-24.935,-12.74 U3.51 | length 28.6
  F.Cu w0.15: U3.51 -38.006,-23.736 -39.3,-22.442 -39.3,-16.338 -39.162,-16.199 -24.06,-16.199 -23.125,-15.265 -23.125,-13.325 -23.71,-12.74 U2.7@-24.935,-12.74
QSPI_SS: R1.2 R2.2 U2.1@-32.145,-11.47 U3.56 | length 25.9
  F.Cu w0.15: U3.56 -40.55,-24.056 -40.55,-12.862 -39.158,-11.47 -32.145,-11.47 -32.145,-8.97 R2.2 -30.615,-8.915 R1.2
RUN: SW2.2 U3.26 | length 12.1
  F.Cu w0.2: U3.26 -31.018,-27.366 -31.018,-27.66 v1(-30.942,-27.737) ; v1(-24.7,-20.75) SW2.2
  B.Cu w0.2: v1(-30.942,-27.737) -26.305,-23.1 -26.305,-22.355 v1(-24.7,-20.75)
SCL: R6.2 U2.23 U3.7 | length 28.1
  F.Cu w0.2: U2.23@-44.55,-8.825 -44.575,-8.85 -45.131,-8.85 -45.881,-9.6 -45.881,-24.309 -43.645,-26.545 ; R6.2 -44,-26.9 -43.645,-26.545 ; U3.7 -38.145,-28.488 -41.702,-28.488 -43.645,-26.545
SDA: R7.2 U2.24 U3.6 | length 26.8
  F.Cu w0.2: U2.24@-44.55,-9.325 -45.182,-9.325 -45.575,-9.718 -45.575,-15.225 -45.581,-15.231 -45.581,-24.185 -43.433,-26.333 ; R7.2 -43.1,-26 -43.433,-26.333 ; U3.6 -38.41,-28.188 -41.577,-28.188 -43.433,-26.333
STBY: U3.8 U4.19 | length 42.9
  F.Cu w0.2: v1(-38.8,-29.7) -38.791,-29.7 U3.8 ; v1(-18.9,-34.4) -18.882,-34.382 -18.882,-33.559 -18.687,-33.365 -16.743,-33.365 -16.528,-33.15 U4.19
  B.Cu w0.2: v1(-38.8,-29.7) -38.8,-38.233 -31.316,-45.717 -31.15,-45.717 -19.833,-34.4 v1(-18.9,-34.4)
SWCLK: U3.24
SWD: U3.25
U\S\B\_\B\O\O\T\: R1.1 SW1.2 | length 2.5
  F.Cu w0.15: SW1.2 -30.59,-5.41 R1.1
USB_D_N: J1.2 R4.2 | length 29.8
  F.Cu w0.381: R4.2 -35.425,-17.323 -35.317,-17.215 -22.956,-17.215 -20.94,-15.199 J1.2
USB_D_P: J1.3 R3.2 | length 29.9
  F.Cu w0.381: R3.2 -36.475,-17.454 -35.586,-16.565 -23.226,-16.565 -21.59,-14.929 J1.3
VBUS: C1.1 J1.1 U1.3 | length 1.9
  F.Cu w0.4: J1.1 -20.29,-2.926 -19.816,-3.4 -19.5,-3.4
VM: C18.2 C19.1 pad.3@-15.074,-42.1 U4.13 U4.14 U4.24 | length 24.3
  F.Cu w0.4: U4.14 -16.6,-29.9 -17.042,-29.458 -16.883,-29.3 -16.632,-29.3 -16.588,-29.256 -15.131,-29.256 U4.13
  B.Cu w2: v2(-16.9,-29.6) -13.305,-29.6 -9.165,-33.74 -9.165,-36.13 pad.3@-15.074,-42.039
XIN: C2.1 U3.20 Y1.1 | length 14.7
  F.Cu w0.2: U3.20 -31.96,-29.818 C2.1@-31.96,-33.701 ; C2.1 C2.1@-31.96,-33.701 ; Y1.1 -30.639,-39.73 -28.525,-37.616 -28.525,-35.866 -30.69,-33.701 C2.1@-31.96,-33.701
XOUT: R5.2 U3.21 | length 3.7
  F.Cu w0.2: U3.21 -31.11,-30.102 -31.11,-31.28 R5.2
pads on no net: J1.4 U2.1@-43.85,-10.045 U2.2@-43.35,-10.045 U2.3@-42.85,-10.045 U2.4@-42.35,-10.045 U2.5@-41.85,-10.045 U2.6@-41.35,-10.045 U2.7@-40.63,-9.325 U2.11 U2.14 U2.15 U2.16 U2.17 U2.19 U2.21 U2.22 U3.2 U3.3 U3.4 U3.9 U3.11 U3.12 U3.13 U3.14 U3.34 U3.35 U3.36 U3.37 U3.38 U3.39 U3.40 U3.41 U3.Un1 U3.Un2 U3.Un3 U3.Un4

## Polygon pours and split planes (outlines as drawn)
+3V3 on F.Cu "F.Cu-+3V3-1" (solid, remove dead copper, pour order 14): 4.079,-46.492 -46.921,-46.492 -46.921,3.508 4.079,3.508
VM on F.Cu "VM_L01_P004" (solid, pour order 4): -16.788,-36.2 -13.9,-36.2 -13.9,-43.5 -16.812,-43.5
GND on F.Cu "GND_L01_P009" (solid, pour order 9): -29.375,-31.616 -24,-29.5 -20,-32.6 -31.863,-43.745 -38.1,-37.6 -31.068,-30.245
+3V3 on F.Cu "+3V3_L01_P015" (solid, pour order 15): -38.985,-25.82 -35.193,-29.612 -34.935,-29.612 -31.236,-25.913 -35.164,-21.986 -35.173,-21.986
VBUS on F.Cu "F.Cu-VBUS" (solid, remove dead copper, pour order 10): -13.59,-4.1 -15.49,-4.1 -15.49,-7.7 -19.89,-7.7 -19.89,-1.9 -17.29,-1.9 -17.29,-1.1 -13.59,-1.1
GND on B.Cu "B.Cu-GND" (solid, remove dead copper, pour order 7): 3.91,-46.6 -47.09,-46.6 -47.09,3.4 3.91,3.4

## Silkscreen, mask and mechanical layers (free items; w line width, h text height)
F.SilkS:
  text "GND" at -30.978,1.916 h1
  text "USB_BOOT" at -32.6,-4.8 h1 r90
  text "Reset" at -23.175,-19.075 h0.8
  text "Custom Minimal Design Example  REV1" at -25.175,-44.4 h1
  text "Raspberry Pi RP2040" at -23.725,-45.3 h1
  text "Gabriel de leon Custom RP2040 Board REV1.0" at -32.585,-46.26 h0.5
Margin:
  the board outline again, w0.254

## Text inside footprints (layer, text, board x,y; h text height)
J1: Dwgs.User "PCB edge" at -22.113,1.729 h0.5